# EAGLE board esp32 (EAGLE 9.6.2)
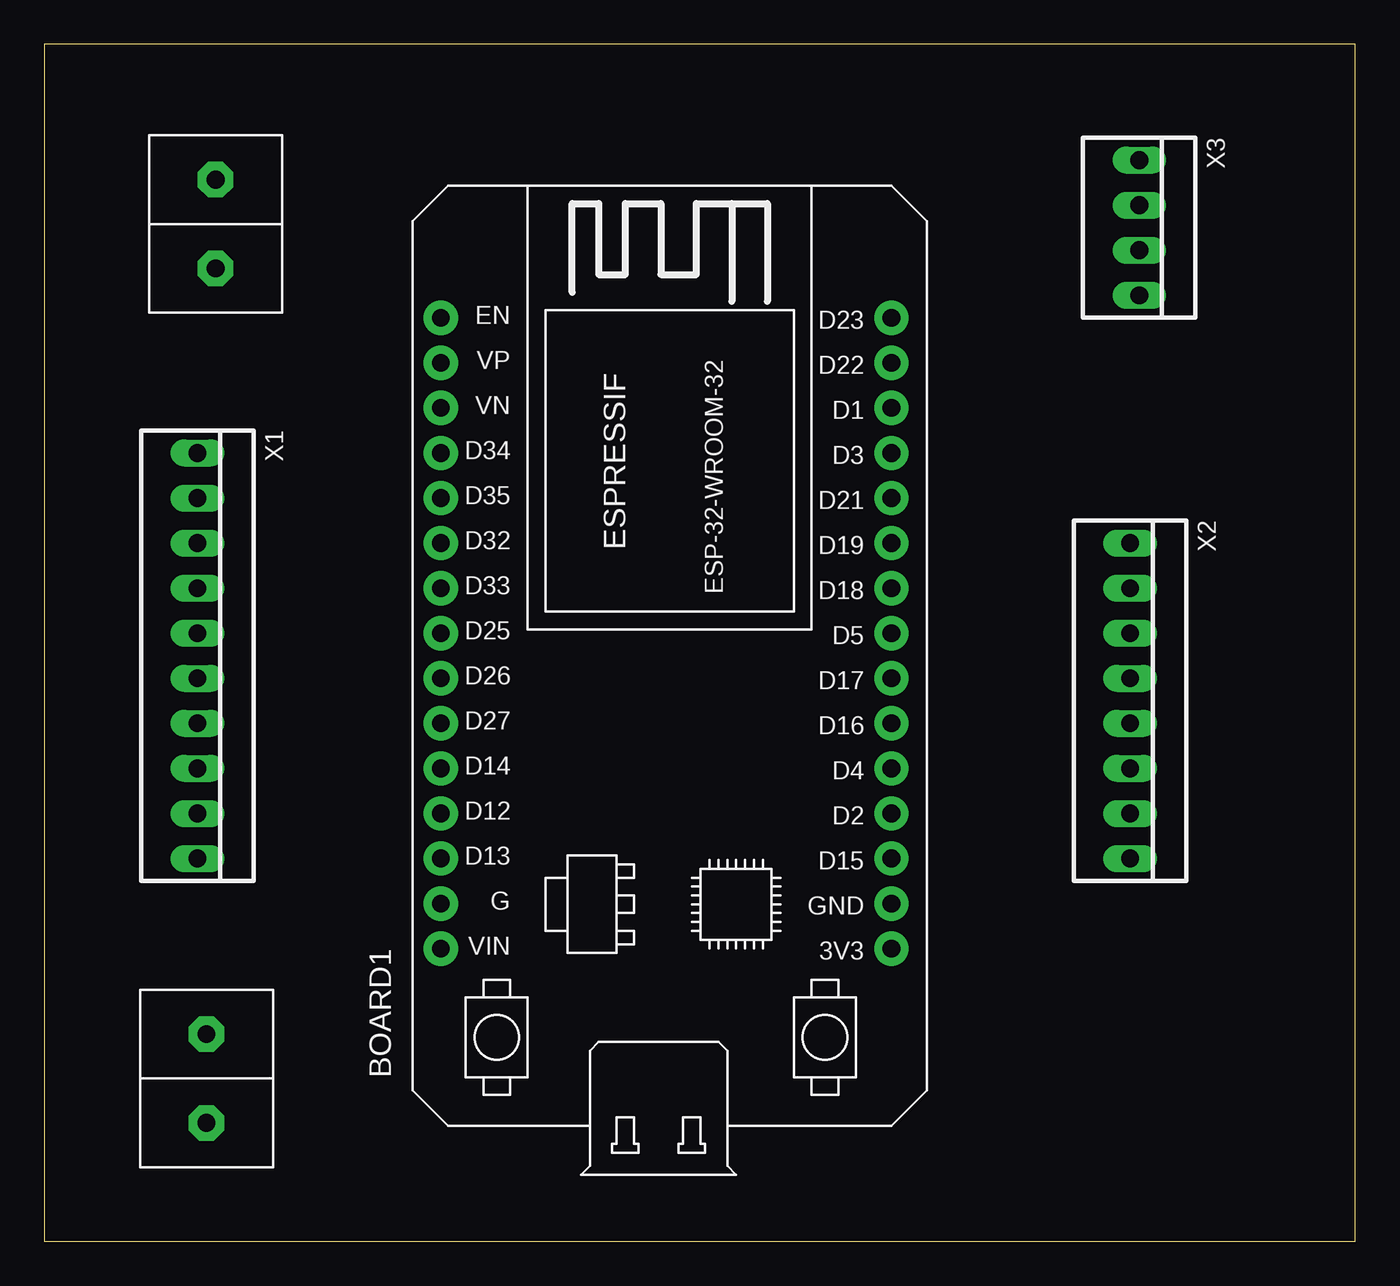
[diagram p0: board, top side]
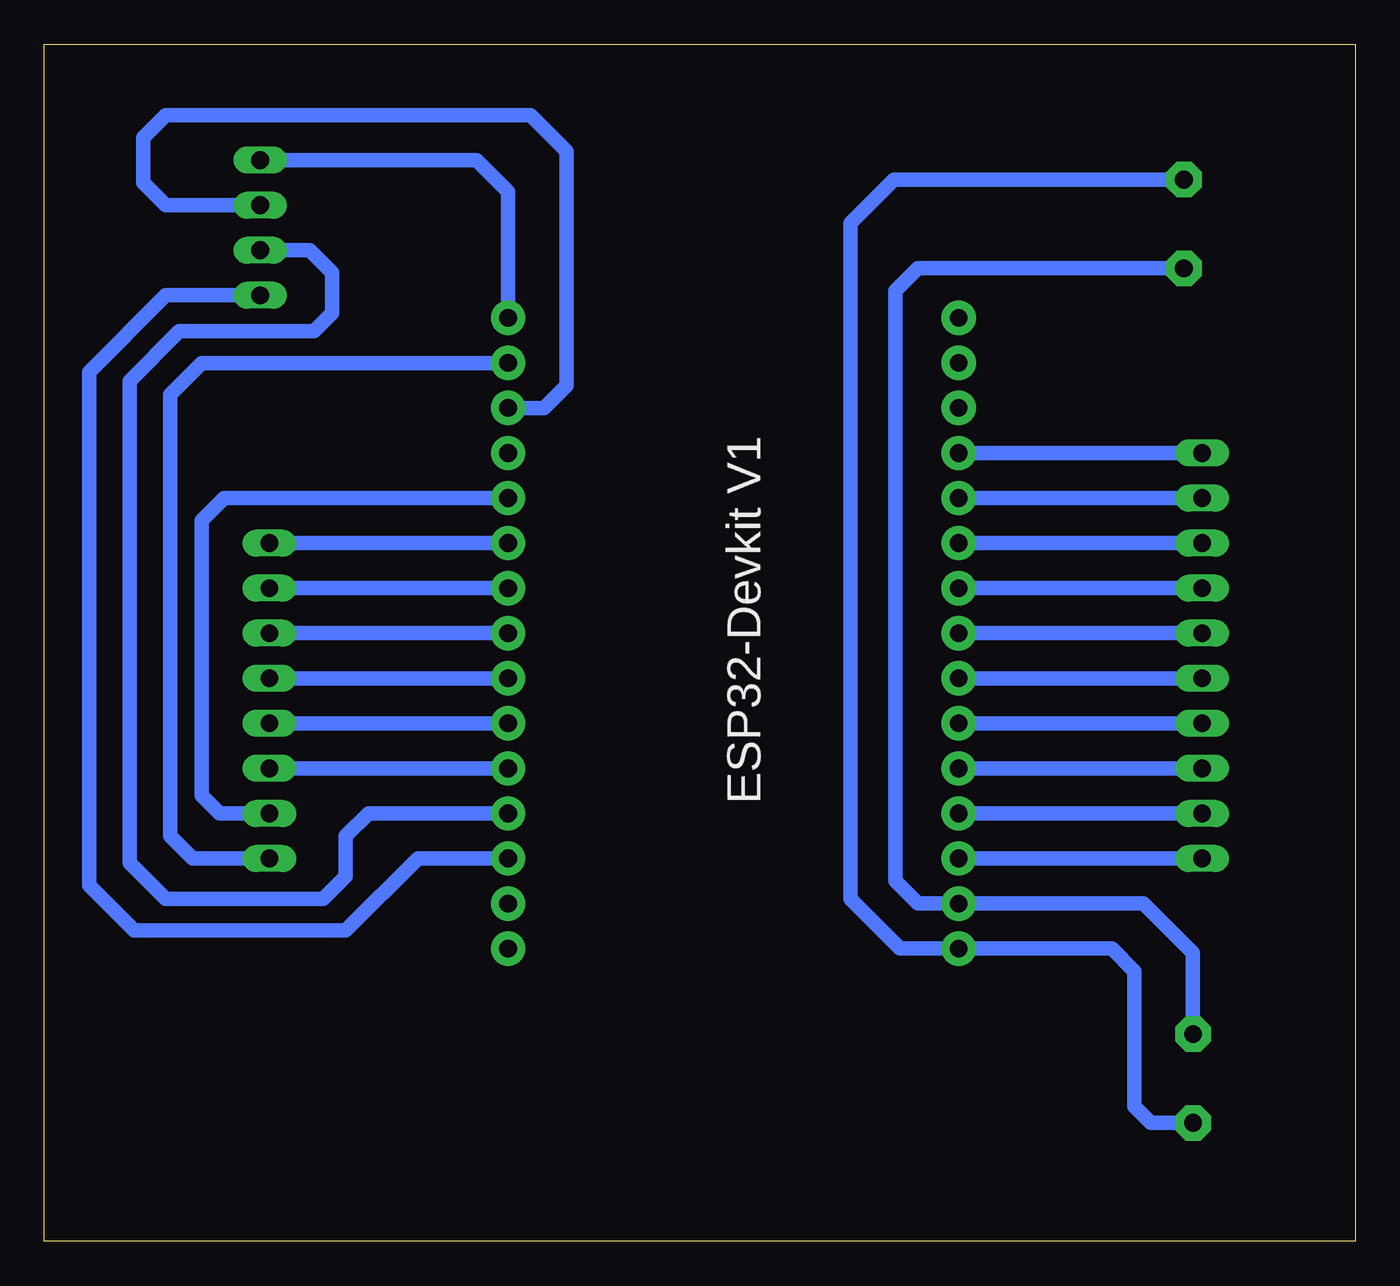
[diagram p1: board, bottom side, seen from below]

Size 73.89 x 67.49 mm. Coordinates in mm from the lower left corner, seen from the top.
Outline: 0,0 73.89,0 73.89,67.49 0,67.49 0,0
Copper layers (1*16): Top 0.035mm / dielectric 1.5mm / Bottom 0.035mm
Design rules "default": minimum track width 6mil, minimum drill 0.35mm, track to track 6mil, track to pad 6mil, pad to pad 6mil, via to via 6mil, smd to smd 6mil, copper to edge 40mil, drill to drill 6mil, minimum pad ring 10mil, minimum via ring 8mil, stop-mask expansion 4mil, vias tented up to drill 0mil, thermal gap 10mil

## Footprints (pad centres in the part's own frame; a part is rotated, then mirrored left to right if it is on the bottom)
ESP32-DEVKITV1 = drill 1 pad 1.93: 3V3 0,0; D1 30.48,0; D2 7.62,0; D3 27.94,0; D4 10.16,0; D5 17.78,0; D12 7.62,25.4; D13 5.08,25.4; D14 10.16,25.4; D15 5.08,0; D16 12.7,0; D17 15.24,0; D18 20.32,0; D19 22.86,0; D21 25.4,0; D22 33.02,0; D23 35.56,0; D25 17.78,25.4; D26 15.24,25.4; D27 12.7,25.4; D32 22.86,25.4; D33 20.32,25.4; D34 27.94,25.4; D35 25.4,25.4; EN 35.56,25.4; GND 2.54,25.4; GND@1 2.54,0; VIN 0,25.4; VN 30.48,25.4; VP 33.02,25.4
DBCONN-1X2 = drill 1 pad 2 octagon: P0 -2.54,0; P1 2.46,0
22-23-2101 = drill 1 long: 1 -11.43,0; 2 -8.89,0; 3 -6.35,0; 4 -3.81,0; 5 -1.27,0; 6 1.27,0; 7 3.81,0; 8 6.35,0; 9 8.89,0; 10 11.43,0
22-23-2081 = drill 1 long: 1 -8.89,0; 2 -6.35,0; 3 -3.81,0; 4 -1.27,0; 5 1.27,0; 6 3.81,0; 7 6.35,0; 8 8.89,0
22-23-2041 = drill 1 long: 1 -3.81,0; 2 -1.27,0; 3 1.27,0; 4 3.81,0

## Placement (x,y rotation side)
BOARD1  ESP32DEVKITV1  [ESP32-DEVKITV1]  47.75,16.51 90 top
U$1  DBCONN-1X2  [DBCONN-1X2]  9.65,57.4 90 top
U$2  DBCONN-1X2  [DBCONN-1X2]  9.14,9.14 270 top
X1  22-23-2101  [22-23-2101]  8.64,33.02 270 top
X2  22-23-2081  [22-23-2081]  61.21,30.48 270 top
X3  22-23-2041  [22-23-2041]  61.72,57.15 270 top

## Library data of the parts
BOARD1 = ESP32-DEVKITV1
U$1 U$2 = Terminal Block Connector
X1 = con-molex; MF: MOLEX; MPN: 22-23-2101; OC_FARNELL: 1756828; OC_NEWARK: 94C0765
X2 = con-molex; MF: MOLEX; MPN: 22-23-2081; OC_FARNELL: 1756826; OC_NEWARK: 01C7592
X3 = con-molex; MF: MOLEX; MPN: 22-23-2041; OC_FARNELL: 1462920; OC_NEWARK: 38C0355

## Nets
D1: BOARD1.D1 X3.2
D2: BOARD1.D2 X3.3
D4: BOARD1.D4 X2.6
D5: BOARD1.D5 X2.3
D12: BOARD1.D12 X1.9
D13: BOARD1.D13 X1.10
D14: BOARD1.D14 X1.8
D15: BOARD1.D15 X3.4
D16: BOARD1.D16 X2.5
D17: BOARD1.D17 X2.4
D18: BOARD1.D18 X2.2
D19: BOARD1.D19 X2.1
D23: BOARD1.D23 X3.1
D25: BOARD1.D25 X1.5
D26: BOARD1.D26 X1.6
D27: BOARD1.D27 X1.7
D32: BOARD1.D32 X1.3
D33: BOARD1.D33 X1.4
D34: BOARD1.D34 X1.1
D35: BOARD1.D35 X1.2
GND: BOARD1.GND U$1.P0 U$2.P0
N$21: BOARD1.GND@1
SCL: BOARD1.D22 X2.8
SDA: BOARD1.D21 X2.7
VCC: BOARD1.VIN U$1.P1 U$2.P1

## Tracks (layer width: path | path; a pad name or v marks a point on that pad's centre or on a via)
D1
  Bottom 0.813: BOARD1.D1 45.72,46.99 44.45,48.26 44.45,61.47 46.48,63.5 67.06,63.5 68.33,62.23 68.33,59.69 67.06,58.42 X3.2
D2
  Bottom 0.813: BOARD1.D2 55.63,24.13 56.9,22.86 56.9,20.57 58.17,19.3 67.06,19.3 69.09,21.34 69.09,23.37 69.09,48.51 66.29,51.31 58.67,51.31 57.66,52.32 57.66,54.61 58.93,55.88 X3.3
D4
  Bottom 0.813: BOARD1.D4 X2.6
D5
  Bottom 0.813: X2.3 BOARD1.D5
D12
  Bottom 0.813: BOARD1.D12 X1.9
D13
  Bottom 0.813: X1.10 BOARD1.D13
D14
  Bottom 0.813: X1.8 BOARD1.D14
D15
  Bottom 0.813: X3.4 67.06,53.34 71.37,49.02 71.37,20.07 68.83,17.53 56.9,17.53 52.83,21.59 BOARD1.D15
D16
  Bottom 0.813: X2.5 BOARD1.D16
D17
  Bottom 0.813: BOARD1.D17 X2.4
D18
  Bottom 0.813: BOARD1.D18 X2.2
D19
  Bottom 0.813: BOARD1.D19 X2.1
D23
  Bottom 0.813: BOARD1.D23 47.75,59.18 49.53,60.96 X3.1
D25
  Bottom 0.813: X1.5 BOARD1.D25
D26
  Bottom 0.813: X1.6 BOARD1.D26
D27
  Bottom 0.813: X1.7 BOARD1.D27
D32
  Bottom 0.813: X1.3 BOARD1.D32
D33
  Bottom 0.813: X1.4 BOARD1.D33
D34
  Bottom 0.813: X1.1 BOARD1.D34
D35
  Bottom 0.813: X1.2 BOARD1.D35
GND
  Bottom 0.813: U$2.P0 9.14,16.26 11.94,19.05 BOARD1.GND 24.64,19.05 25.91,20.32 25.91,53.59 24.64,54.86 16,54.86 14.22,54.86 U$1.P0
SCL
  Bottom 0.813: BOARD1.D22 65.02,49.53 66.8,47.75 66.8,22.86 65.53,21.59 X2.8
SDA
  Bottom 0.813: X2.7 64.01,24.13 65.02,25.15 65.02,40.64 63.75,41.91 BOARD1.D21
VCC
  Bottom 0.813: U$2.P1 11.51,6.68 12.45,7.62 12.45,15.24 13.72,16.51 BOARD1.VIN 25.65,16.51 28.45,19.3 28.45,57.4 25.99,59.86 U$1.P1